# Altium PCB UI.PcbDoc
Units mil, origin at the board's own origin, x right, y up, seen from the top; angles counter-clockwise.
Board outline 6000 x 4000 mil, 2 copper layers (Top Layer, Bottom Layer); 19 components, 16 nets, 72 pads, 25 vias.
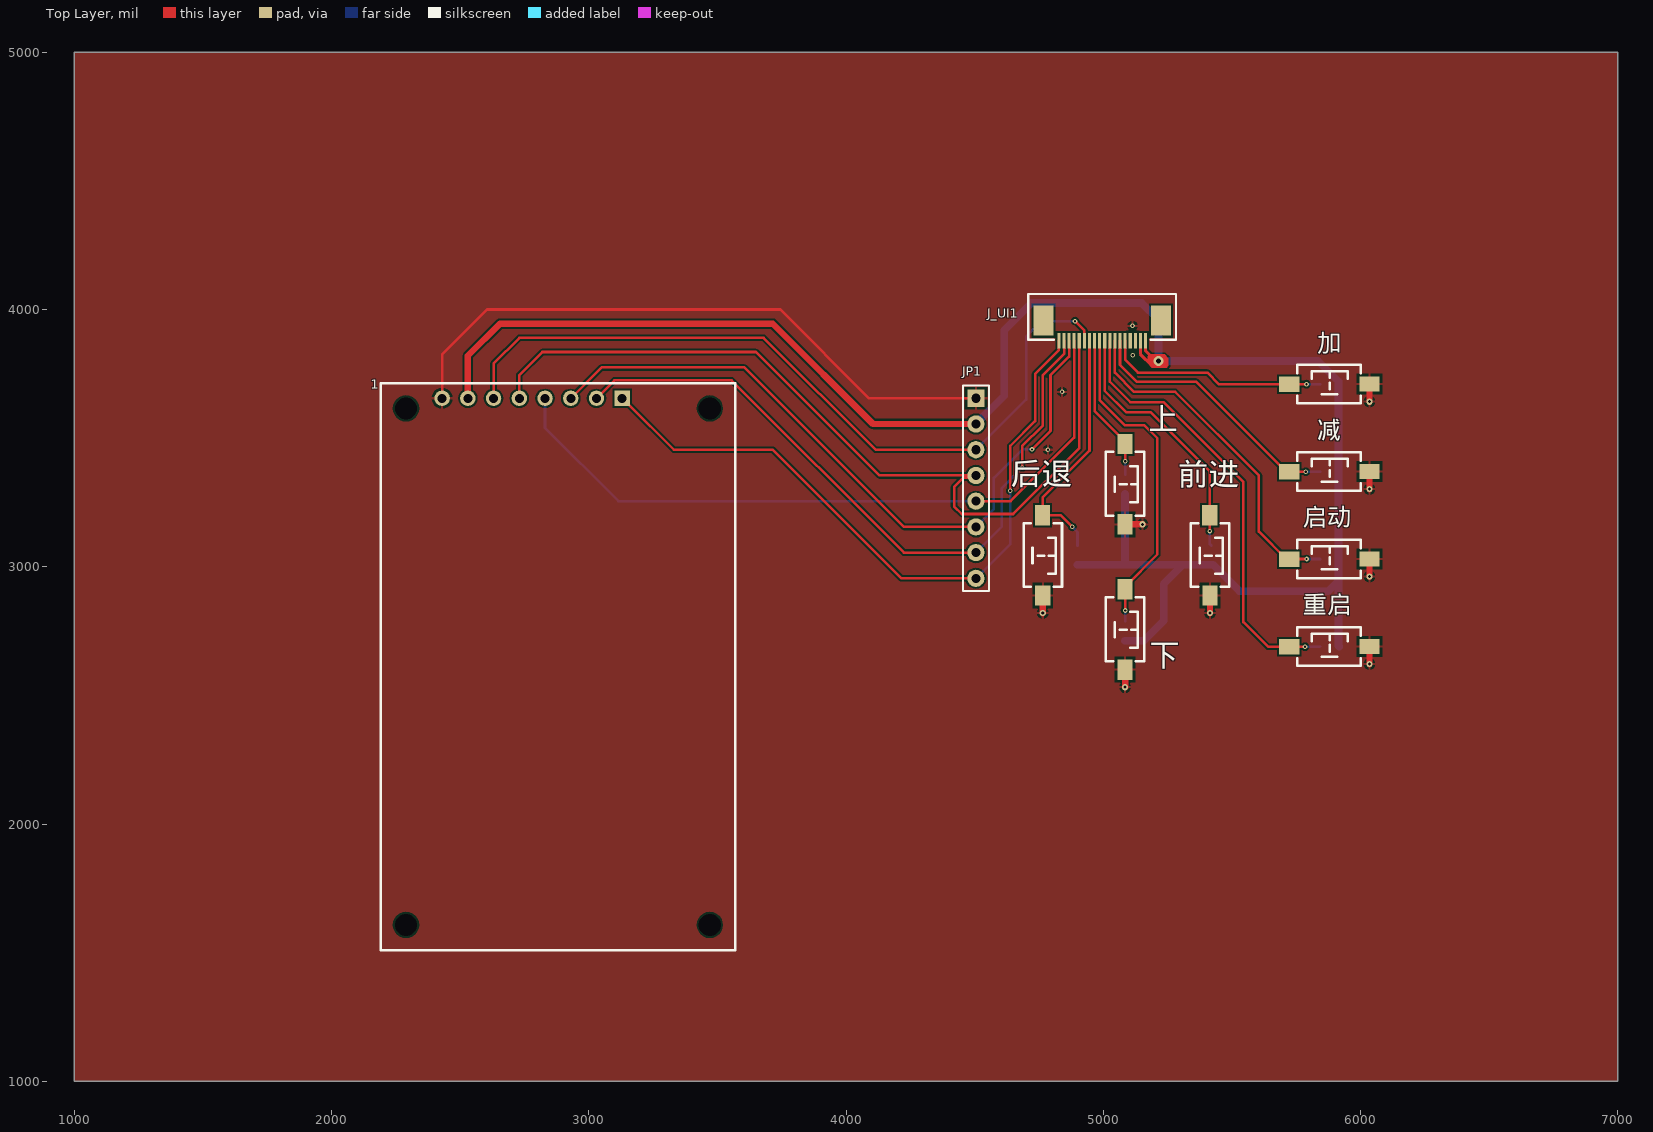
[diagram p0: Top Layer view]
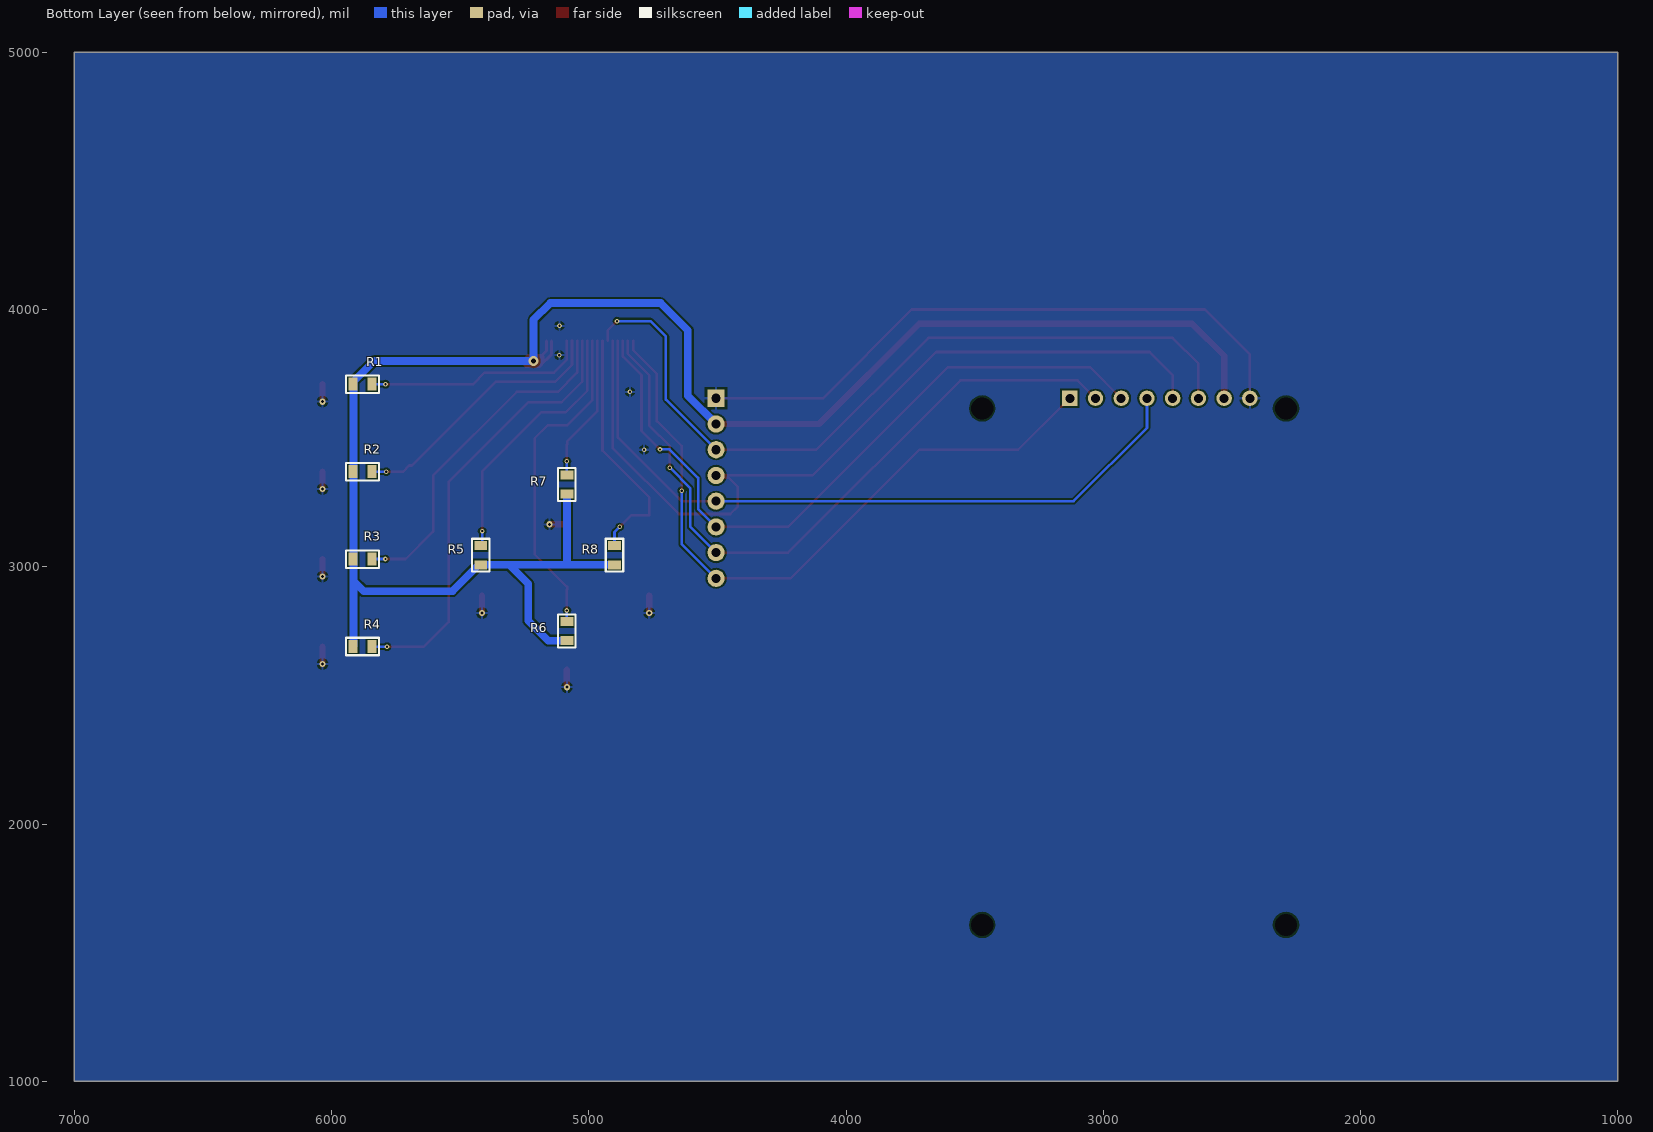
[diagram p1: Bottom Layer view, seen from below]

## Layer stack, top to bottom
Top Solder: solder mask 0.4, Solder Resist, Dk 3.5
Top Layer: signal copper 1.4
Dielectric 1: dielectric 12.6, FR-4, Dk 4.8
Bottom Layer: signal copper 1.4
Bottom Solder: solder mask 0.4, Solder Resist, Dk 3.5

## Board outline
1000,1000 7000,1000 7000,5000 1000,5000

## Design rules (kind name [scope] priority, off if disabled: settings)
Clearance [All] p1: gap=7 ignorepadtopadclearanceinfootprint=FALSE
PolygonConnect [All] p1: connectstyle=Relief reliefconductorwidth=10 reliefentries=4 polygonreliefangle="90 Angle" airgapwidth=10
RoutingVias [All] p1: holewidth=28 width=50 viastyle="Through Hole" minholewidth=28 minwidth=50 maxholewidth=28 maxwidth=50
SolderMaskExpansion [All] p1: expansion=4 istentingtop=FALSE
Width [All] p1: maxlimit=111 minlimit=10 preferedwidth=10
30 further rules are at their usual default settings.

## Components (designator, comment, footprint, x,y, rotation, side; value= is the part's Value field where it differs from the comment)
1 "U?" 1.8'TFT 3568.98,3714.06 r0 top
J_UI1 "FPC05-18" FPC-05mm-18 4988.41,3980 r0 top
JP1 "HDR-1X8" HDR2.54-LI-8P 4505,3305 r270 top
R1 "10K" "R 0805_L" 5880,3710 r180 bottom
R2 "10K" "R 0805_L" 5880,3370 r180 bottom
R3 "10K" "R 0805_L" 5880,3030 r180 bottom
R4 "10K" "R 0805_L" 5880,2690 r180 bottom
R5 "10K" "R 0805_L" 5420,3045 r90 bottom
R6 "10K" "R 0805_L" 5085,2750 r90 bottom
R7 "10K" "R 0805_L" 5085,3320 r90 bottom
R8 "10K" "R 0805_L" 4900,3045 r90 bottom
上 "3x6x5" "TSW SMD-3*6*2.5" 5085,3320 r270 top (schematic designator SW7)
下 "3x6x5" "TSW SMD-3*6*2.5" 5085,2755 r270 top (schematic designator SW6)
减 "3x6x5" "TSW SMD-3*6*2.5" 5880,3370 r0 top (schematic designator SW2)
前进 "3x6x5" "TSW SMD-3*6*2.5" 5415.03,3043.17 r270 top (schematic designator SW5)
加 "3x6x5" "TSW SMD-3*6*2.5" 5880,3710 r0 top (schematic designator SW1)
后退 "3x6x5" "TSW SMD-3*6*2.5" 4765.03,3043.17 r270 top (schematic designator SW8)
启动 "3x6x5" "TSW SMD-3*6*2.5" 5880,3030 r0 top (schematic designator SW3)
重启 "3x6x5" "TSW SMD-3*6*2.5" 5880,2690 r0 top (schematic designator SW4)

## Footprints (in the part's own frame and the unit in brackets; to place one, negate y for a bottom-side part, rotate by r counter-clockwise, add the part's x,y. Pads: shape width x height; smd on the part's side, far side on the other; paste and mask are expansions set on the pad)
1.8'TFT [mil]
  round 60 hole 35: 1(-1138.98,-59.06) 2(-1038.98,-59.06) 3(-938.98,-59.06) 4(-838.98,-59.06) 5(-738.98,-59.06) 6(-638.98,-59.06) 7(-538.98,-59.06)
  rect 60x60 hole 35: 8(-438.98,-59.06)
  round 60 hole 86.61: 29(-1279.53,-2106.3) 29(-1279.53,-98.43) 29(-98.43,-2106.3) 29(-98.43,-98.43)
  silkscreen extent -1378,-2205 0,0
FPC-05mm-18 [mm]
  rect 2x3 smd: 0(-5.606,-0.579) 0(5.992,-0.579)
  rect 0.305x1.5 smd: 1(4.468,-2.579) 2(3.965,-2.579) 3(3.462,-2.579) 4(2.959,-2.579) 5(2.456,-2.579) 6(1.953,-2.579) 7(1.45,-2.579) 8(0.947,-2.579) 9(0.444,-2.579) 10(-0.059,-2.579) 11(-0.561,-2.579) 12(-1.064,-2.579) 13(-1.567,-2.579) 14(-2.07,-2.579) 15(-2.573,-2.579) 16(-3.076,-2.579) 17(-3.579,-2.579) 18(-4.082,-2.579)
  silkscreen extent -7.11,-2.48 7.49,2.04, body extent -7.02,-2.68 7.41,2.43, height 2.01
HDR2.54-LI-8P [mm] "排针，8脚"
  rect 1.7x1.7 hole 0.9: 1(-8.89,0)
  round 1.7 hole 0.9: 2(-6.35,0) 3(-3.81,0) 4(-1.27,0) 5(1.27,0) 6(3.81,0) 7(6.35,0) 8(8.89,0)
  silkscreen extent -10.16,-1.27 10.16,1.27, body extent -10.16,-1.27 10.16,1.27, height 8.5
"R 0805_L" [mil] "1/8W贴片电阻"
  rect 35x50 smd: 1(-37.4,0) 2(37.4,0)
  silkscreen extent -64,-34 64,34, body extent -39,-25 39,25, height 20
"TSW SMD-3*6*2.5" [mm] "3*6*2.5mm"
  rect 2x1.5 smd: 1(-3.996,-0.02) 2(3.937,0)
  silkscreen extent -3.21,-1.9 3.09,1.9, body extent -4,-1.88 4,1.62, height 2.59

## Part data
1: library part 1.8'TFT
JP1: library part "Header 8", "8P接插件", BOM名称=8P接插件, 学习资源=www.ooocke.com, 版权归属=源创客
R1 R2 R3 R4 R5 R6 R7 R8: library part R, "贴片电阻", BOM名称=贴片电阻, 学习资源=www.ooocke.com, 版权归属=源创客
上 下 减 前进 加 后退 启动 重启: library part "TSW 3x6", "3x6轻触开关", BOM名称=3x6轻触开关, 学习资源=www.ooocke.com, 版权归属=源创客

## Via types
v1: diameter 18, hole 9, Top Layer to Bottom Layer, 16 vias
v2: diameter 24, hole 12, Top Layer to Bottom Layer, 8 vias
v3: diameter 40, hole 20, Top Layer to Bottom Layer, 1 vias

## Nets (pads, with @x,y where several pads share a name; then routed paths per layer and width w, separated by ;. In a path a pad name is that pad's centre, name@x,y a point inside that pad or via, vN(x,y) a via of type N, cw(c..) or ccw(c..) an arc to the next point about the centre after c; other vN are vias at no path point)
3.3V: 1.2 J_UI1.1 J_UI1.2 JP1.2 R1.1 R2.1 R3.1 R4.1 R5.1 R6.1 R7.1 R8.1 | length 7340.9
  Top Layer w12: J_UI1.2@5144.5,3851.43 J_UI1.2@5144.5,3878.44 ; J_UI1.2@5144.53,3851.39 5144.53,3826.36 5189.54,3781.35 ; J_UI1.1@5164.3,3878.39 5164.3,3851.43 5164.38,3851.35 5164.38,3839.86 v3@5198.71,3805.53
  Top Layer w25: 1.2 2530,3820 2655,3945 3715,3945 4105,3555 JP1.2
  Bottom Layer w30: JP1.2 4615,3665 4615,3920 4720,4025 5150,4025 5215.07,3959.93 v3(5215.07,3799.59) 5835.31,3799.59 5914.9,3720 5914.9,3710.09 5915,3710 5915,2945 ; R8.1 5085,3007.6 ; R6.1 5157.6,2712.6 5235,2790 5235,2933.43 5309.16,3007.6 ; R7.1 5085,3007.6 ; R4.1 5915,2692.4 5915,2945 ; 5085,3007.6 5309.16,3007.6 ; 5309.16,3007.6 R5.1 5427.5,3007.6 5530.09,2905 5875,2905 5915,2945
ATOM1_CH7_P15_4: 1.8 J_UI1.18 JP1.8 | length 2722.2
  Top Layer w10: 1.8@3130.33,3655 3130.33,3654.67 3155,3630 3155.33,3630 3330.33,3455 3715,3455 4215,2955 JP1.8 ; v1(4638.52,3295.21) 4638.52,3469.76 4735,3566.24 4735,3750 4827.22,3842.22 4827.22,3877.99 J_UI1.18
  Bottom Layer w10: JP1.8 4638.87,3088.87 4638.87,3294.85 v1(4638.52,3295.21)
GND: 1.1 J_UI1.3 J_UI1.4 JP1.1 上.2 下.2 减.2 前进.2 加.2 后退.2 启动.2 重启.2 | length 3005.9
  Top Layer w10: 1.1 2430,3825 2605,4000 3745,4000 4090,3655 JP1.1
  Top Layer w25: v2(4765,2820) 后退.2 ; v2@5085,2531.85 下.2 ; 上.2 v2@5153.15,3165 ; v2(5415,2820) 前进.2 ; v2@6035,2621.85 重启.2 ; v2@6035,2961.85 启动.2 ; v2@6035,3301.85 减.2 ; v2@6035,3641.85 加.2
  other v1: 4785,3455 4840,3680 5114.59,3822.73 5114.01,3936.4
  other v2: 5084.97,2531.83 6034.97,2621.83 6034.97,2961.83 5153.17,3164.97 6034.97,3301.83 6034.97,3641.83
P02_9: J_UI1.7 R3.2 启动.1 | length 1349.6
  Top Layer w10: J_UI1.7 5045.5,3754.5 5120,3680 5280,3680 5605,3355 5605,3137.06 5712.84,3029.21 5713.72,3030.09 v1(5790.52,3030.09)
  Bottom Layer w10: v1(5790.52,3030.09) 5842.51,3030.09 R3.2
P10_0: J_UI1.9 R5.2 前进.1 | length 1023.2
  Top Layer w10: J_UI1.9 5005.9,3684.1 5090,3600 5185,3600 5414.24,3370.76 前进.1 5414.41,3200.32 v1(5414.41,3138.74)
  Bottom Layer w10: v1(5414.41,3138.74) 5414.41,3087.99 R5.2
P10_7: J_UI1.5 R1.2 加.1 | length 871
  Top Layer w10: J_UI1.5 5085.1,3804.9 5135,3755 5405,3755 5450.79,3709.21 加.1 5723.47,3710 v1(5790,3710)
  Bottom Layer w10: v1(5790,3710) R1.2
P10_8: J_UI1.6 R2.2 减.1 | length 1043.5
  Top Layer w10: J_UI1.6 5065.3,3784.7 5130,3720 5360.89,3720 5687.15,3393.74 5698.16,3393.74 减.1 5722.94,3369.47 v1(5787.08,3369.47)
  Bottom Layer w10: v1(5787.08,3369.47) 5842.07,3369.47 R2.2
P11_2: J_UI1.12 R8.2 后退.1 | length 969
  Top Layer w10: v1(4880,3155) 4834.51,3200.49 后退.1 4764.24,3269.24 4946.5,3451.5 J_UI1.12
  Bottom Layer w10: v1(4880,3155) 4900,3135 R8.2
P11_9: J_UI1.11 R7.2 上.1 | length 570.2
  Top Layer w10: J_UI1.11 4966.3,3605.07 5084.21,3487.16 上.1 5085,3476.53 v1(5085,3410)
  Bottom Layer w10: R7.2 v1(5085,3410)
P11_11: J_UI1.10 R6.2 下.1 | length 1280.2
  Top Layer w10: J_UI1.10 4986.1,3648.9 5085,3550 5160,3550 5210,3500 5210,3047.94 5084.21,2922.16 下.1 5085,2911.53 v1(5085,2830)
  Bottom Layer w10: R6.2 v1(5085,2830)
P11_13: J_UI1.8 R4.2 重启.1 | length 1723.4
  Top Layer w10: J_UI1.8 5025.7,3719.3 5105,3640 5235,3640 5545,3330 5545,2785 5640.79,2689.21 重启.1 v1(5784.21,2689.21) v1@5785,2690
  Bottom Layer w10: v1(5784.21,2689.21) 5841.82,2689.21 R4.2
P15_0: 1.6 J_UI1.16 JP1.6 | length 2776.7
  Top Layer w10: 1.6 3050,3775 3605,3775 4225,3155 JP1.6 ; v1(4723.11,3456.17) 4795,3528.06 4795,3745 4867.3,3817.3 J_UI1.16
  Bottom Layer w10: JP1.6 4575,3225 4575,3345 4686.17,3456.17 v1(4723.11,3456.17)
P15_1: 1.5 J_UI1.15 JP1.5 | length 2768.9
  Top Layer w10: JP1.5 4640,3255 4887.1,3502.1 J_UI1.15
  Bottom Layer w10: 1.5 2830,3540 3115,3255 JP1.5
P15_2: 1.7 J_UI1.17 JP1.7 | length 2746.6
  Top Layer w10: 1.7 3100,3725 3555,3725 4225,3055 JP1.7 ; v1(4685,3385) 4685,3468.68 4765,3548.68 4765,3745 4847.98,3827.98 J_UI1.17@4847.98,3877.99
  Bottom Layer w10: JP1.7 4605,3155 4605,3305 v1(4685,3385)
P15_3: 1.3 J_UI1.13 JP1.3 | length 3058.9
  Top Layer w10: 1.3 2630,3790 2730,3890 3680,3890 4115,3455 JP1.3 ; v1(4890.25,3955.02) 4926.7,3918.56 J_UI1.13
  Bottom Layer w10: JP1.3 4700,3650 4700,3895 4760,3955 v1@4890,3955
P15_5: 1.4 J_UI1.14 JP1.4 | length 3302
  Top Layer w10: 1.4 2730,3745 2820,3835 3650,3835 4130,3355 JP1.4 4496.54,3346.54 4456.54,3346.54 4420,3310 4420,3235 4450,3205 4650,3205 4906.9,3461.9 J_UI1.14
pads on no net: 1.29 J_UI1.0

## Polygon pours and split planes (outlines as drawn)
GND on Top Layer "GND_L01_P000" (solid, remove dead copper, pour order 0): 1000,1000 7000,1000 7000,5000 1000,5000
GND on Bottom Layer "GND_L02_P001" (solid, remove dead copper, pour order 1): 1000,1000 7000,1000 7000,5000 1000,5000

## Other copper
Top Layer:
  region net 3.3V: 5187.81,3774.59 5247.77,3774.59 5253.71,3780.53 5253.71,3810.53 5238.71,3825.53 5178.65,3825.53 5172.16,3819.04 5172.16,3790.24

## Silkscreen, mask and mechanical layers (free items; w line width, h text height)
Top Solder:
  text "2022年" at 3710,2820 h90
  text "电子科技大学中山学院" at 3709.81,2702.97 h90
  text "四轮摄像头" at 3709.87,2584.61 h90
  text "窝法氦镁烷" at 4161.12,2584.29 h90
Mechanical 1:
  lines w10: 2190,2510.05 2190,4080 2625,4080 6125,4080 6125,2510.05 2190,2510.05